# Allegro board AVRUSB500.brd
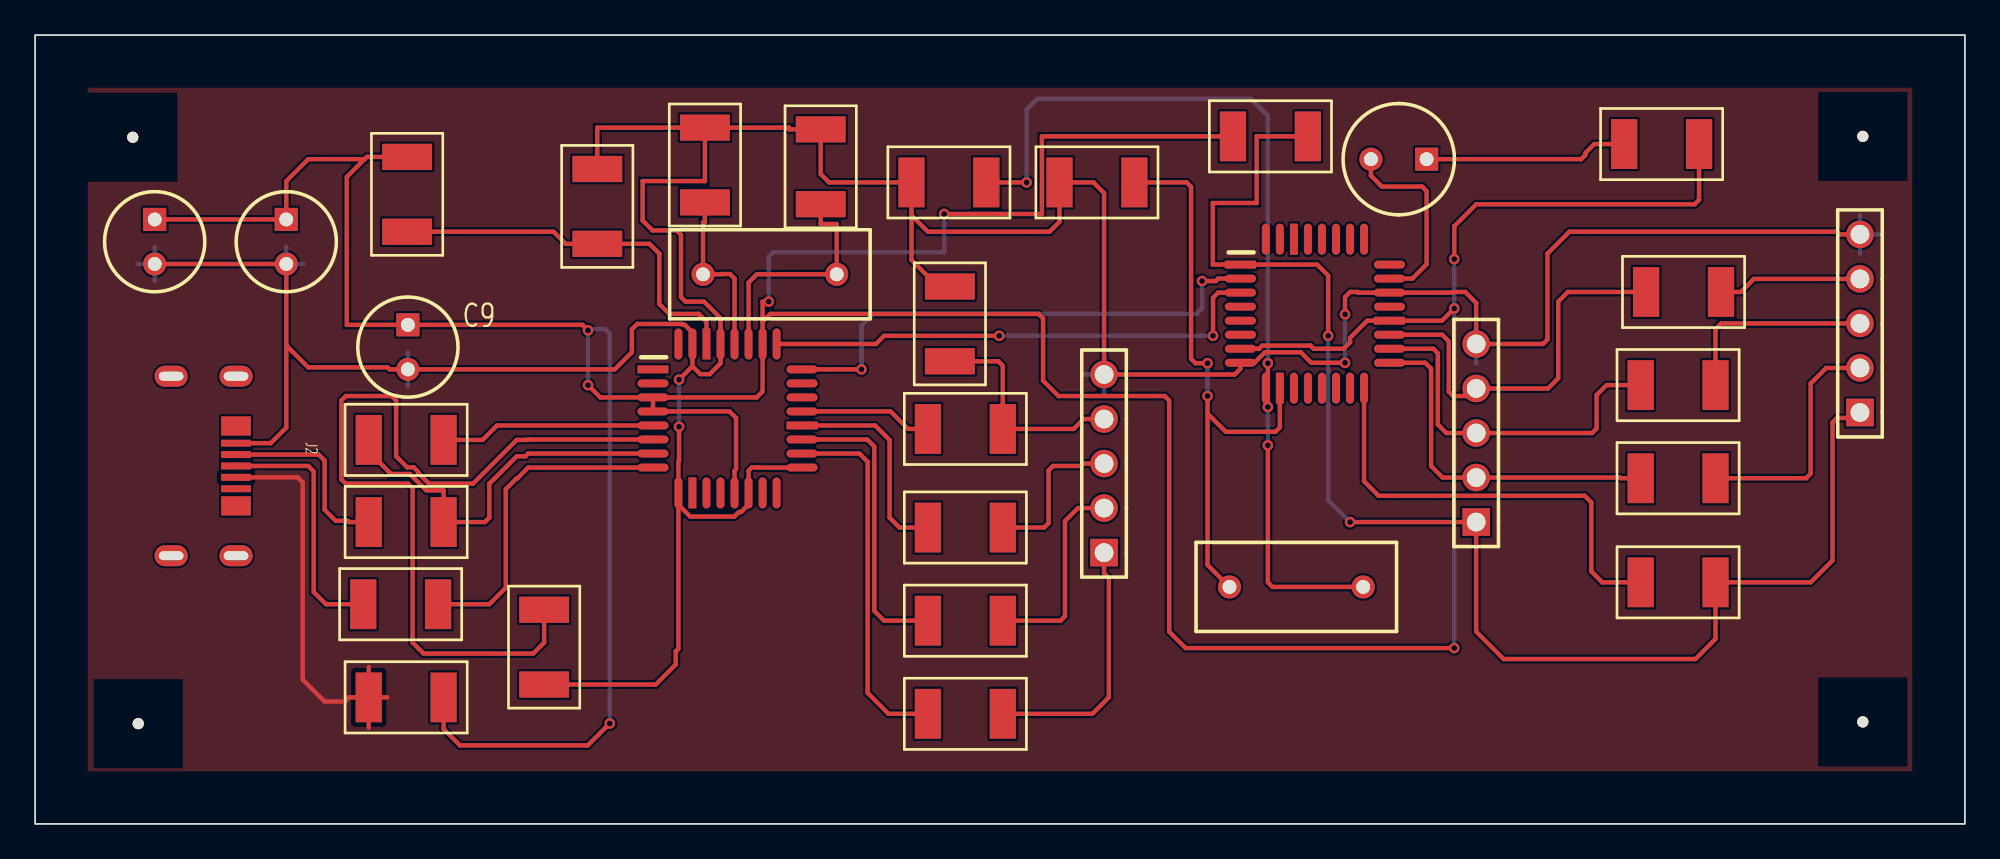
[diagram p0: board, top side]
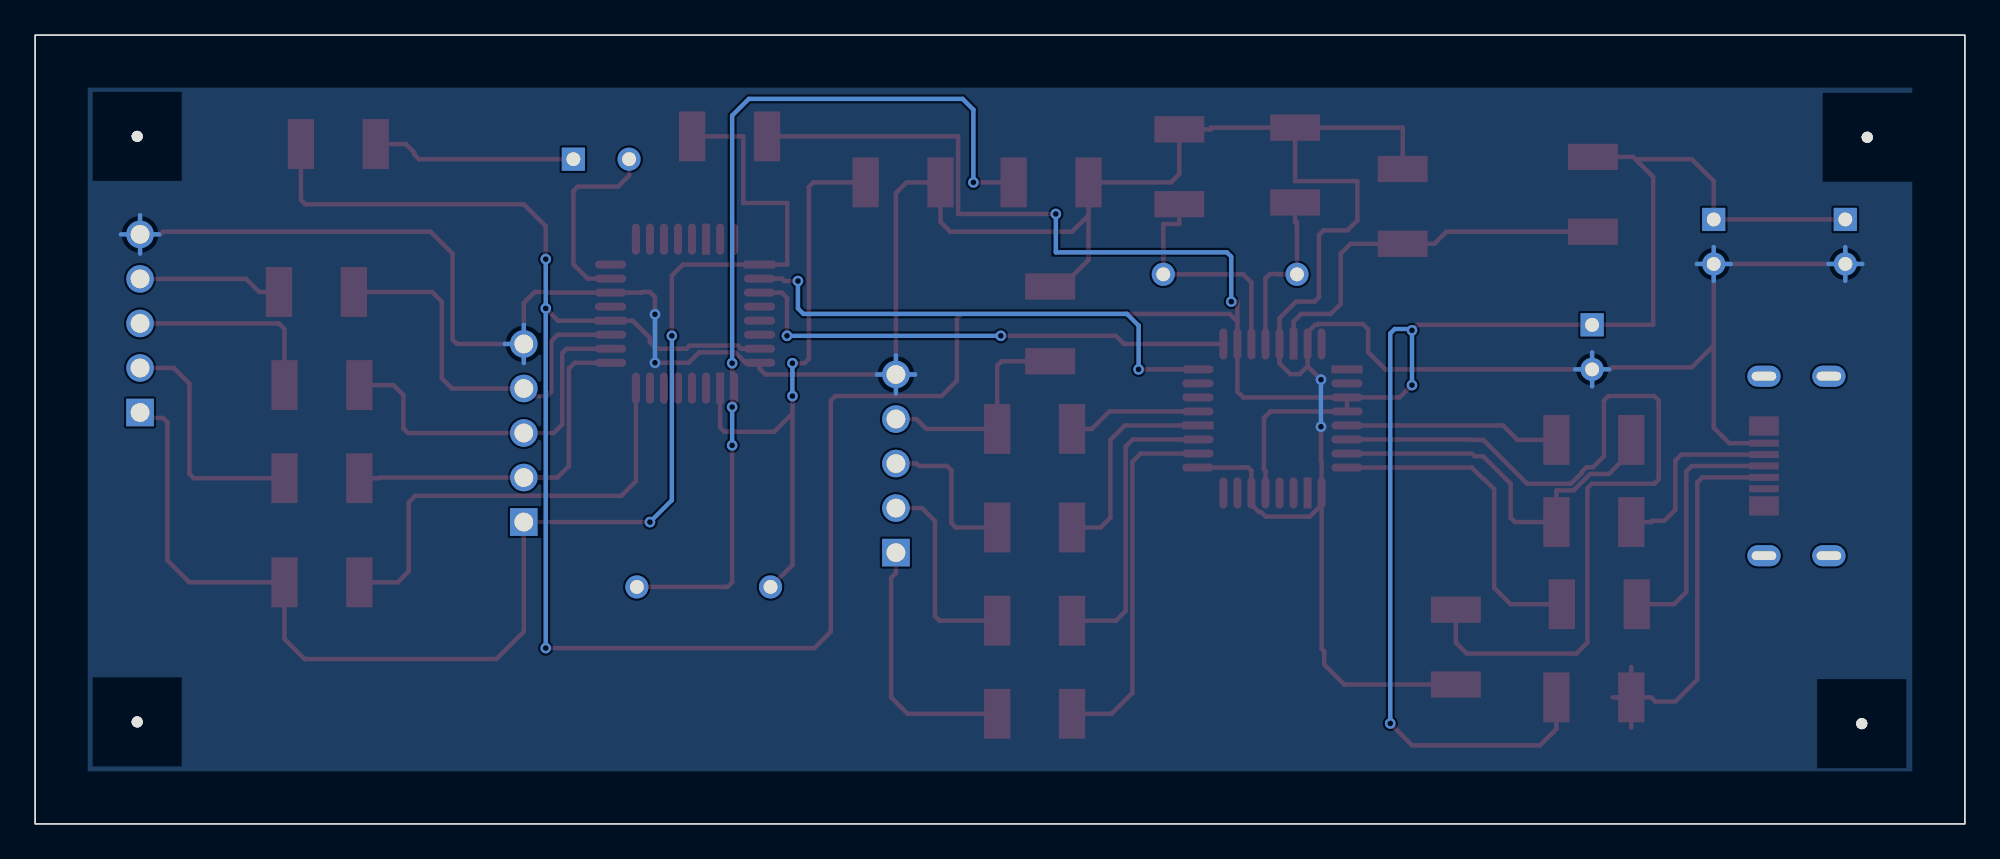
[diagram p1: board, bottom side, seen from below]

Outline 110 x 45 mm; copper layers: TOP, BOTTOM. Coordinates in mm from the lower left corner of the outline.
Outline path: rectangle 0,0 110,45

## Design rules (mm)
constraint set DEFAULT: min track width 0.254

## Placement (name value [footprint] x y rotation side)
C1  47nF  [SML2015]  32.05 37.36 270 top
C2  27pF  [SML2015]  38.18 39.72 270 top
C3  27pF  [SML2015]  44.78 39.62 270 top
C4  47nF  [SML2015]  29.02 12.22 270 top
C5  100nF  [CPCYL1D225LS100031#2]  14.32 34.48 270 top
C6  1uF  [CPCYL1D225LS100031#2]  6.82 34.48 270 top
C9  100nF  [CPCYL1D225LS100031#2]  21.25 28.47 270 top
C10  22nF  [SML2015]  52.14 30.66 270 top
C13  100nF  [CPCYL1D225LS100031]  49.95 36.59 0 top
C14  100nF  [CPCYL1D225LS100031]  58.39 36.59 0 top
D3  LED  [CYLD250LS125031]  79.32 37.92 180 top
IC3  ATmega8  [QUAD80M32WG900]  68.7 31.91 270 top
J1  bbpg_Bitbang  [BLKCON100VHTM1SQSW1005]  60.93 15.48 90 top
J2  USBA  [MICRO_USB]  7.75 20.42 270 top
J7  avrusb500_out  [BLKCON100VHTM1SQSW1005]  104.02 23.47 90 top
J8  firmware_in  [BLKCON100VHTM1SQSW1005]  82.14 17.22 90 top
NOREF  -  [unnamed]  5.57 39.17 0 top
NOREF#2  -  [#2]  0 45 0 top
NOREF#3  -  [unnamed]  104.18 39.22 0 top
NOREF#4  -  [#2]  110 0 90 top
NOREF#5  -  [unnamed]  5.88 5.72 0 top
NOREF#6  -  [unnamed]  104.18 5.82 0 top
R1  470  [AX400X100031]  21.2 33.78 90 top
R2  220  [AX400X100031]  50.89 22.53 0 top
R3  220  [AX400X100031]  50.89 16.91 0 top
R4  220  [AX400X100031]  50.89 11.59 0 top
R5  27  [AX400X100031]  18.7 12.53 0 top
R6  27  [AX400X100031]  19.02 17.22 0 top
R7  1.5k  [AX400X100031]  19.02 21.91 0 top
R8  2.2  [AX400X100031]  19.02 7.22 0 top
R14  220  [AX400X100031]  50.89 6.28 0 top
R22  10k  [AX400X100031]  68.28 39.22 0 top
R23  470  [AX400X100031]  90.58 38.78 0 top
R24  1k  [AX400X100031]  91.83 30.34 0 top
R25  220  [AX400X100031]  91.52 25.03 0 top
R26  1k  [AX400X100031]  91.52 19.72 0 top
R27  220  [AX400X100031]  91.52 13.78 0 top
U1  FT232BM  [QUAD80M32WG900]  35.22 25.93 270 top
Y2  6Mhz  [RAD450X200LS300031]  38.07 31.35 0 top
Y4  3.6864Mhz  [RAD450X200LS300031]  68.08 13.52 0 top

## Library data of the parts
C1-C3 C10 C13 C14 = CAPACITOR NON-POL: alternate symbols: (SML2015)
C4 C5 C9 = CAPACITOR NON-POL: alternate symbols: (SMDCAP)
C6 = CAPACITOR POL: alternate symbols: (SMDCAP)
D3 = LED
IC3 = ATmega8-DIL28_1
J1 J7 J8 = CON5
J2 = CON4_7
R1-R8 R14 R22-R27 = R: alternate symbols: (SML2015)
U1 = FT232BM_2
Y2 Y4 = ZTA

## Footprints (pads in the part's own frame, mm; a bottom-side part is the same pattern mirrored in y, then rotated)
AX400X100031
  rect 1.499x2.845 smd: 1(0,0) 2(4.267,0)
BLKCON100VHTM1SQSW1005
  rect 1.575x1.575 hole 1.067: 1(0,0)
  round 1.575 hole 1.067: 2(2.54,0) 3(5.08,0) 4(7.62,0) 5(10.16,0)
CPCYL1D225LS100031
  rect 1.499x2.845 smd: 1(0,0) 2(4.267,0)
CPCYL1D225LS100031#2
  rect 1.321x1.321 hole 0.787: 1(0,0)
  round 1.321 hole 0.787: 2(2.54,0)
CYLD250LS125031
  rect 1.321x1.321 hole 0.787: 1(0,0)
  round 1.321 hole 0.787: 2(3.175,0)
MICRO_USB
  oval 1.2x1.9 hole 0.5x1.4: (-5.12,3.7) (-5.12,0) (5.12,3.7) (5.12,0)
  rect 1.1x1.7 smd: (-2.28,3.7) (2.28,3.7)
  rect 0.4x1.7 smd: 1(-1.3,3.7) 2(-0.65,3.7) 3(0,3.7) 4(0.65,3.7) 5(1.3,3.7)
QUAD80M32WG900
  rect 0.457x1.778 smd: 1(0,0) 20(3.2,8.496)
  oval 0.457x1.778 smd: 2(0.8,0) 3(1.6,0) 4(2.4,0) 5(3.2,0) 6(4,0) 7(4.801,0) 8(5.601,0) 17(5.601,8.496) 18(4.801,8.496) 19(4,8.496) 21(2.4,8.496) 22(1.6,8.496) 23(0.8,8.496) 24(0,8.496)
  oval 1.778x0.457 smd: 9(7.048,1.448) 11(7.048,3.048) 12(7.048,3.848) 13(7.048,4.648) 14(7.048,5.448) 15(7.048,6.248) 16(7.048,7.048) 25(-1.448,7.048) 26(-1.448,6.248) 27(-1.448,5.448) 28(-1.448,4.648) 29(-1.448,3.848) 31(-1.448,2.248) 32(-1.448,1.448)
  rect 1.778x0.457 smd: 10(7.048,2.248) 30(-1.448,3.048)
RAD450X200LS300031
  round 1.321 hole 0.787: 1(0,0) 2(7.62,0)
SML2015
  rect 1.499x2.845 smd: 1(0,0) 2(4.267,0)
unnamed
  round 0.635 hole 3.175 unplated: (0,0)

## Nets
+5V: J2.4 R8.1
GND: C1.1 C2.1 C3.1 C4.2 C5.2 C6.2 C9.2 C10.1 C13.1 C14.1 IC3.8 IC3.22 J1.5 J2.1 J7.5 J8.5 U1.9 U1.14 U1.17 U1.29 U1.31
VCC: C5.1 C6.1 C9.1 IC3.7(VCC) IC3.20 R1.2 R8.2 R22.1 R23.2 U1.3 U1.4 U1.13 U1.26
BMISO: J1.3 R3.2
BMOSI: J1.2 R4.2
BRESET: J1.1 R14.2
BSCK: C10.2 J1.4 R2.2
D+: J2.2 R6.1
D-: J2.3 R5.1
F_MISO: IC3.18 J8.3 R25.1
F_MOSI: IC3.17 J8.2 R26.1
F_SCK: IC3.19 J8.4 R24.1
MISO: J7.3 R25.2
MOSI: J7.2 R26.2
RESET: IC3.1 J7.1 J8.1 R22.2 R27.2
RXD: IC3.2 U1.24
SCK: J7.4 R24.2
TXD: IC3.3 U1.25
N02483: R6.2 R7.1 U1.7
N02615: R5.2 U1.8
N03527: C4.1 U1.6
N06839: R2.1 U1.21
N06967: R3.1 U1.20
N07033: R4.1 U1.19
N07247: R14.1 U1.18
N11951: R7.2 U1.5
N41098: C3.2 U1.27 Y2.2
N41106: C2.2 U1.28(XTOUT) Y2.1
N49165: C1.2 R1.1 U1.30
N102449: D3.2(CATHODE) IC3.23
N102453: D3.1 R23.1
N102465: C13.2 IC3.9 Y4.2
N102601: C14.2 IC3.10 Y4.1
N102743: IC3.16 R27.1

Pads without a net: IC3 4 5 6 11 12 13 14 15 21 24 25 26 27 28 29 30 31 32; J2 5; U1 1 2 10 11 12 15 16 22 23 32

## Via types
v1: diameter 0.61, hole 0.33, TOP to BOTTOM, 24 vias

## Routing (per net, layer and track width the routed paths; a pad name or vN(x,y) marks a point on that pad's centre or on a via; arc(x,y) is an arc through that point)
+5V: length 24.1
  TOP w0.254: J2.4 14.97,19.77 15.25,19.48 15.25,8.23 16.5,6.98 17.65,6.98 17.89,7.22 R8.1 ; R8.1 19.02,8.95 ; R8.1 19.02,5.49 ; R8.1 20.07,7.22
GND: length 239.6
  TOP w0.254: C4.2 35.38,7.95 36.52,9.09 36.52,9.84 36.67,9.99 36.67,18.21 ; C10.1 51.47,30.66 49.95,32.17 49.95,34.72 ; v1(36.7,22.66) 36.7,20.7 36.67,20.66 U1.9 36.67,18.21 ; 36.67,18.21 37.34,17.53 39.86,17.53 40.12,17.79 40.24,17.79 40.67,18.22 U1.14 40.67,20.15 40.86,20.34 41.2,20.34 41.22,20.33 U1.17 ; v1(74.67,26.31) 72.74,26.31 72.14,26.91 70.1,26.91 69.5,26.31 IC3.8 68.7,25.97 68.37,25.64 J1.5 60.93,35.99 60.33,36.59 C14.1 58.39,34.35 57.83,33.78 50.89,33.78 49.95,34.72 ; 37.47,26.11 U1.31 37.47,28.04 37.04,28.47 36.92,28.47 36.87,28.52 34.32,28.52 34.02,28.22 34.02,26.91 33.04,25.93 C9.2 20.21,25.93 20.09,26.04 15.57,26.04 14.32,27.29 ; 37.47,26.11 37.92,25.66 38.45,25.66 39.07,26.27 U1.29 39.07,28.85 38.13,29.79 37.07,29.79 36.82,30.05 36.82,33.6 36.56,33.86 35.2,33.86 34.63,34.42 34.63,36.67 38.18,36.67 C2.1 ; 37.47,26.11 v1(36.7,25.34) ; 49.95,34.72 C13.1 45.25,36.59 44.78,37.07 C3.1 42.98,39.62 42.98,39.72 C2.1 ; 14.32,27.29 C5.2 C6.2 ; 14.32,27.29 14.32,22.61 13.43,21.72 J2.1 ; v1(74.67,29.07) 74.67,30.06 74.95,30.34 75.39,30.34 75.42,30.31 IC3.22 80.76,30.31 80.79,30.34 81.52,30.34 82.14,29.72 J8.5 85.95,27.38 86.2,27.63 86.2,32.53 87.45,33.78 102.7,33.78 102.85,33.63 J7.5 ; C2.1 32.05,39.72 C1.1
  BOTTOM w0.254: J8.5 82.14,28.47 ; J8.5 83.24,27.38 ; J8.5 82.14,26.29 ; 14.32,30.98 C5.2 ; C5.2 15.28,31.94 ; C5.2 13.35,31.94 ; C5.2 14.32,32.91 ; v1(36.7,25.34) v1(36.7,22.66) ; 60.93,24.54 J1.5 ; J1.5 62.03,25.64 ; J1.5 59.84,25.64 ; J1.5 60.93,26.73 ; C6.2 7.78,31.94 ; C6.2 6.82,30.98 ; C6.2 6.82,32.91 ; C6.2 5.85,31.94 ; 104.02,32.54 J7.5 ; J7.5 104.02,34.72 ; J7.5 105.11,33.63 ; J7.5 102.92,33.63 ; 20.28,25.93 C9.2 ; C9.2 21.25,24.96 ; C9.2 21.25,26.9 ; C9.2 22.22,25.93 ; v1(74.67,26.31) v1(74.67,29.07)
VCC: length 254
  TOP w0.254: IC3.7 69.76,27.11 69.94,27.29 72.7,27.29 72.88,27.11 74.58,27.11 74.95,27.48 74.95,27.73 75.93,28.71 IC3.20 80.19,28.71 v1(80.89,29.41) ; U1.3 41.13,24.33 41.47,24.67 U1.26 41.47,28.65 ; U1.3 U1.4 39.58,23.53 39.95,23.16 39.95,20.24 39.87,20.15 U1.13 ; U1.3 32.22,24.33 v1(31.52,25.03) ; 18.78,37.92 17.77,36.91 17.77,28.47 C9.1 31.2,28.47 v1(31.52,28.16) ; 18.78,37.92 15.57,37.92 14.32,36.67 C5.1 C6.1 ; 18.78,37.92 18.91,38.05 R1.2 ; 41.47,28.65 41.47,29.79 v1(41.82,29.79) ; 41.47,28.65 41.92,29.09 57.2,29.09 57.45,28.84 57.45,25.29 58.33,24.41 64.39,24.41 64.64,24.15 64.64,10.97 65.58,10.03 v1(80.89,10.03) ; v1(80.89,32.22) 80.89,34.09 82.14,35.34 94.59,35.34 94.85,35.6 R23.2 ; v1(32.75,5.73) 31.5,4.48 24.22,4.48 23.28,5.42 R8.2 ; v1(51.82,34.79) 57.39,34.79 57.39,39.22 R22.1
  BOTTOM w0.254: v1(41.82,29.79) 41.82,32.35 42.07,32.61 51.82,32.61 v1(51.82,34.79) ; v1(80.89,32.22) v1(80.89,29.41) v1(80.89,10.03) ; v1(31.52,25.03) v1(31.52,28.16) 31.59,28.23 32.5,28.23 32.75,27.98 v1(32.75,5.73)
BMISO: length 9
  TOP w0.254: R3.2 57.51,16.91 57.77,17.16 57.77,20.17 58.02,20.42 59.63,20.42 59.76,20.56 J1.3
BMOSI: length 11.6
  TOP w0.254: J1.2 59.44,18.02 58.7,17.28 58.7,11.85 58.45,11.59 R4.2
BRESET: length 14.8
  TOP w0.254: R14.2 60.27,6.28 61.2,7.22 61.2,14.04 60.93,14.31 J1.1
BSCK: length 12.7
  TOP w0.254: J1.4 59.76,23.1 59.2,22.53 R2.2 55.16,26.14 54.91,26.39 C10.2
D+: length 10.8
  TOP w0.254: R6.1 17.89,17.22 17.81,17.29 17.13,17.29 16.5,17.92 16.5,20.73 16.17,21.07 J2.2
D-: length 14.5
  TOP w0.254: J2.3 15.57,20.42 15.88,20.11 15.88,13.23 16.58,12.53 R5.1
F_MISO: length 20.9
  TOP w0.254: IC3.18 79.7,27.11 79.95,26.85 79.95,22.79 80.44,22.3 J8.3 88.75,22.3 89,22.55 89,24.47 89.57,25.03 R25.1
F_MOSI: length 20.3
  TOP w0.254: IC3.17 79.24,26.31 79.57,25.97 79.57,20.41 80.23,19.76 J8.2 90.35,19.76 90.39,19.72 R26.1
F_SCK: length 22.9
  TOP w0.254: IC3.19 80.2,27.91 80.58,27.53 80.58,24.66 80.83,24.41 81.89,24.41 82.14,24.66 J8.4 86.24,24.84 86.82,25.42 86.82,29.8 87.37,30.34 R24.1
MISO: length 11.6
  TOP w0.254: J7.3 96.1,28.55 95.78,28.23 R25.2
MOSI: length 13.9
  TOP w0.254: R26.2 100.95,19.72 101.2,19.97 101.2,25.12 102.1,26.01 J7.2
RESET: length 82.4
  TOP w0.254: J7.1 103.7,23.16 102.71,23.16 102.45,22.9 102.45,15.03 101.2,13.78 R27.2 95.78,10.55 94.64,9.41 83.7,9.41 82.14,10.97 J8.1 v1(74.95,17.22) ; v1(73.7,27.84) 73.7,31.28 73.08,31.91 IC3.1 67.13,31.91 67.13,35.42 69.63,35.42 69.63,39.22 R22.2
  BOTTOM w0.254: v1(73.7,27.84) 73.7,18.47 v1(74.95,17.22)
RXD: length 29.5
  TOP w0.254: U1.24 v1(47.1,25.93) ; v1(66.52,30.97) 67.3,30.97 67.44,31.11 IC3.2
  BOTTOM w0.254: v1(66.52,30.97) 66.52,29.41 66.2,29.09 47.77,29.09 47.1,28.43 v1(47.1,25.93)
SCK: length 8.2
  TOP w0.254: R24.2 97.23,30.34 97.97,31.09 J7.4
TXD: length 28.9
  TOP w0.254: v1(54.95,27.84) 48.39,27.84 47.93,27.38 U1.25 ; IC3.3 67.44,30.31 67.14,30.01 v1(67.14,27.84)
  BOTTOM w0.254: v1(54.95,27.84) v1(67.14,27.84)
N02483: length 22.3
  TOP w0.254: U1.7 28.11,21.13 27.95,20.97 27.45,20.97 25.89,19.41 25.89,17.47 25.64,17.22 R6.2 23.28,19.02 23.28,19.03 22.3,19.03 21.36,19.96 20.29,19.96 19.02,21.23 R7.1
N02615: length 18.8
  TOP w0.254: R5.2 25.89,12.53 26.83,13.47 26.83,19.09 27.45,19.72 27.5,19.72 28.11,20.33 U1.8
N03527: length 50.4
  TOP w0.254: C4.1 29.02,10.34 28.39,9.72 22.14,9.72 21.52,10.34 21.52,19.15 21.26,19.41 17.71,19.41 17.45,19.66 17.45,24.15 17.71,24.41 20.33,24.41 20.58,24.15 20.58,20.97 21.2,20.34 21.58,20.34 21.83,20.09 21.83,20.03 22.45,19.41 24.95,19.41 27.45,21.91 28.09,21.91 28.11,21.93 U1.6
N06839: length 7.6
  TOP w0.254: U1.21 48.76,23.53 49.76,22.53 R2.1
N06967: length 12.2
  TOP w0.254: U1.20 47.88,22.73 48.7,21.91 48.7,17.47 49.27,16.91 R3.1
N07033: length 16.9
  TOP w0.254: R4.1 48.39,11.59 47.84,12.15 47.84,21.53 47.43,21.93 U1.19
N07247: length 21
  TOP w0.254: R14.1 48.65,6.28 47.45,7.47 47.45,20.66 46.98,21.13 U1.18
N11951: length 12.3
  TOP w0.254: U1.5 26.33,22.73 25.51,21.91 R7.2
N41098: length 13.6
  TOP w0.254: U1.27 40.67,30.88 41.14,31.35 Y2.2 45.69,34.22 44.78,34.22 C3.2
N41106: length 9.9
  TOP w0.254: U1.28 39.87,31.12 39.61,31.37 39.13,31.37 39.11,31.35 Y2.1 38.07,34.32 38.18,34.32 C2.2
N49165: length 22.1
  TOP w0.254: U1.30 38.27,28.65 37.83,29.09 36.15,29.09 35.58,29.66 35.58,32.53 35.02,33.09 C1.2 30.24,33.09 29.55,33.78 R1.1
N102449: length 11.1
  TOP w0.254: D3.2 76.14,36.98 76.77,36.36 79.06,36.36 79.32,36.1 79.32,31.92 78.5,31.11 IC3.23
N102453: length 11.7
  TOP w0.254: R23.1 88.87,38.78 88.38,38.29 88.38,38.17 88.13,37.92 D3.1
N102465: length 53.1
  TOP w0.254: C13.2 v1(56.52,36.59) ; v1(70.27,26.28) 70.27,24.97 IC3.9 70.27,24.74 v1(70.27,23.78) ; Y4.2 70.53,13.52 70.27,13.78 v1(70.27,21.59)
  BOTTOM w0.254: v1(70.27,21.59) v1(70.27,23.78) ; v1(56.52,36.59) 56.52,40.75 57.13,41.36 69.32,41.36 70.27,40.41 v1(70.27,26.28)
N102601: length 34.4
  TOP w0.254: C14.2 65.64,36.59 65.89,36.34 65.89,26.53 66.14,26.28 v1(66.83,26.28) ; v1(66.83,24.41) 66.83,23.41 ; 66.83,23.41 66.83,14.77 Y4.1 ; 66.83,23.41 67.87,22.37 70.7,22.37 70.95,22.62 IC3.10
  BOTTOM w0.254: v1(66.83,26.28) v1(66.83,24.41)
N102743: length 25.8
  TOP w0.254: R27.1 89.33,13.78 88.7,14.41 88.7,18.34 88.33,18.72 76.58,18.72 75.75,19.55 IC3.16

## Copper pours and planes (outline as drawn; the poured copper is in the pictures)
+5V on TOP: 6.5,26.98 6.5,13.54 13.07,13.54 13.07,26.98
+5V on TOP: 3,3 3,42 107,42 107,3
GND on BOTTOM: 3,3 3,42 107,42 107,3

## Text on the board
NCLEGEND-1-2: FIGURE | FINISHED_SIZE | 0.33 | 0.7869 | 1.0671 | 3.175 | 1.4x0.5001 | DRILL CHART: TOP to BOTTOM | ALL UNITS ARE IN MILLIMETERS | PLATED | NON-PLATED | QTY | 24 | 12 | 15 | 4
